# Altium PCB VYLT_IOT_CCM.PcbDoc
Units mm, origin at the board's own origin, x right, y up, seen from the top; angles counter-clockwise.
Board outline 137.1 x 87.1 mm, 4 copper layers (L1, L2, L3, L4), stack 1.58 mm thick; 10 components, 126 nets, 232 pads, 6 vias.
Unrouted connection lines stored in the file: 72.
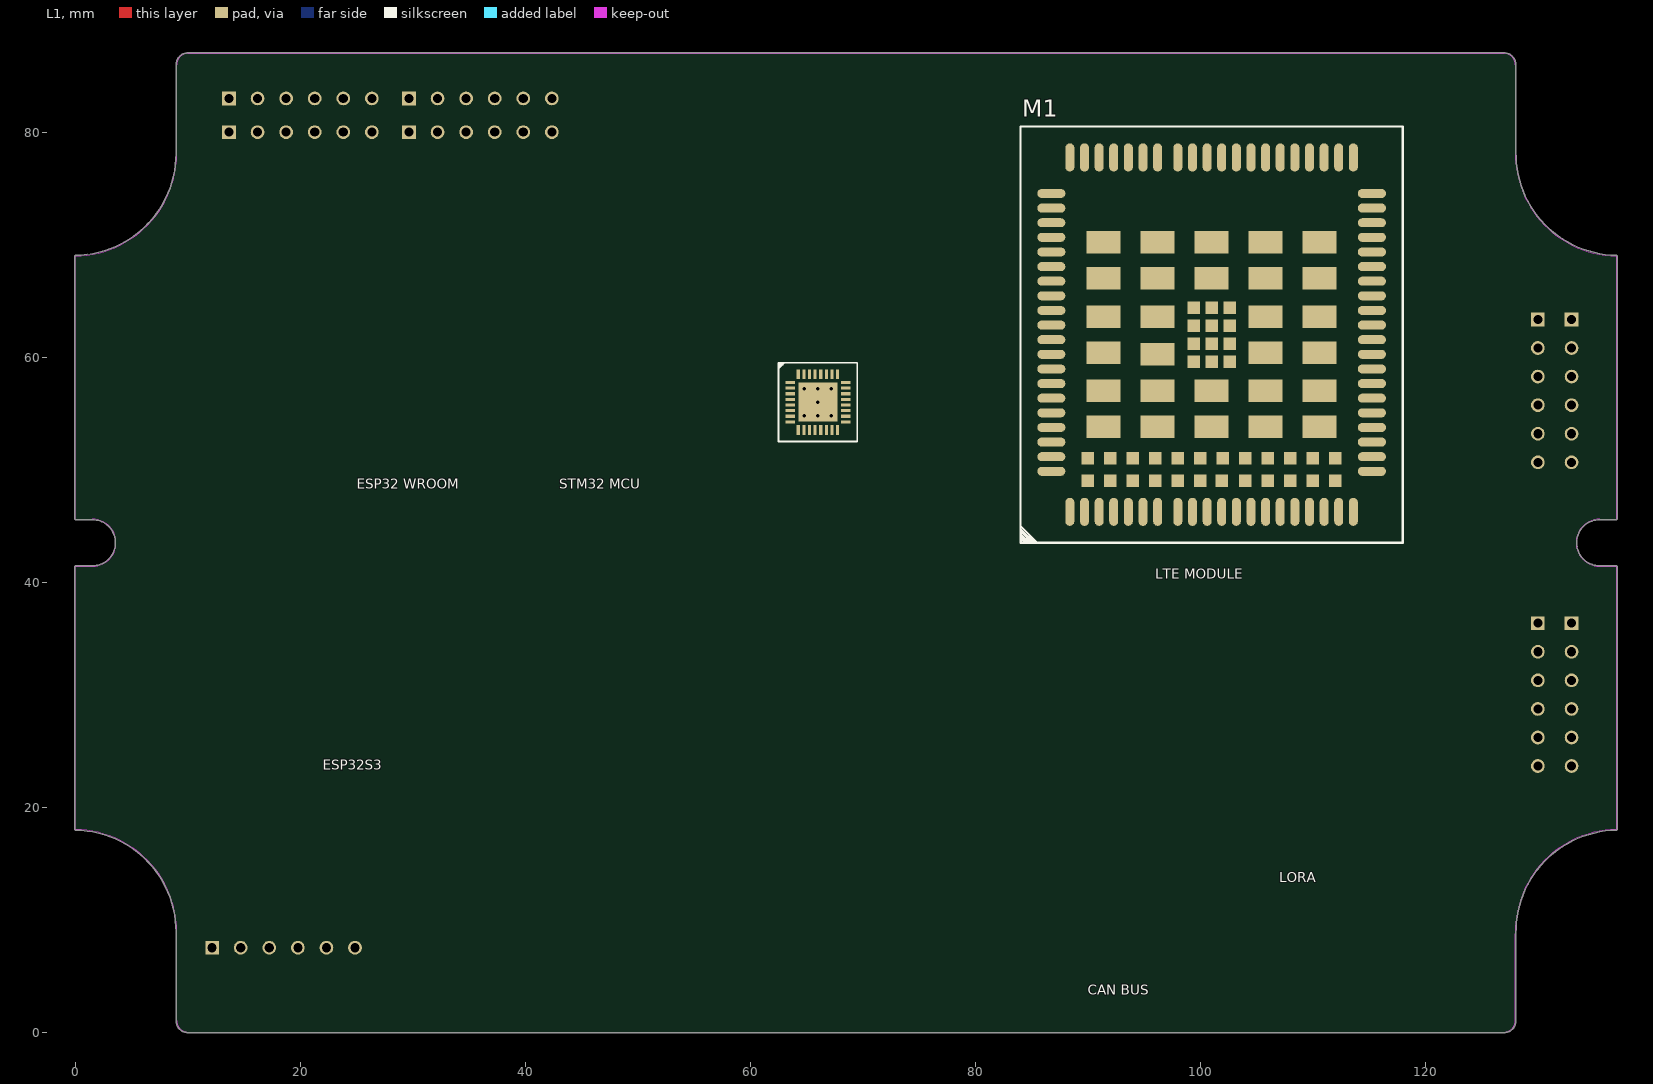
[diagram p0: L1 view]
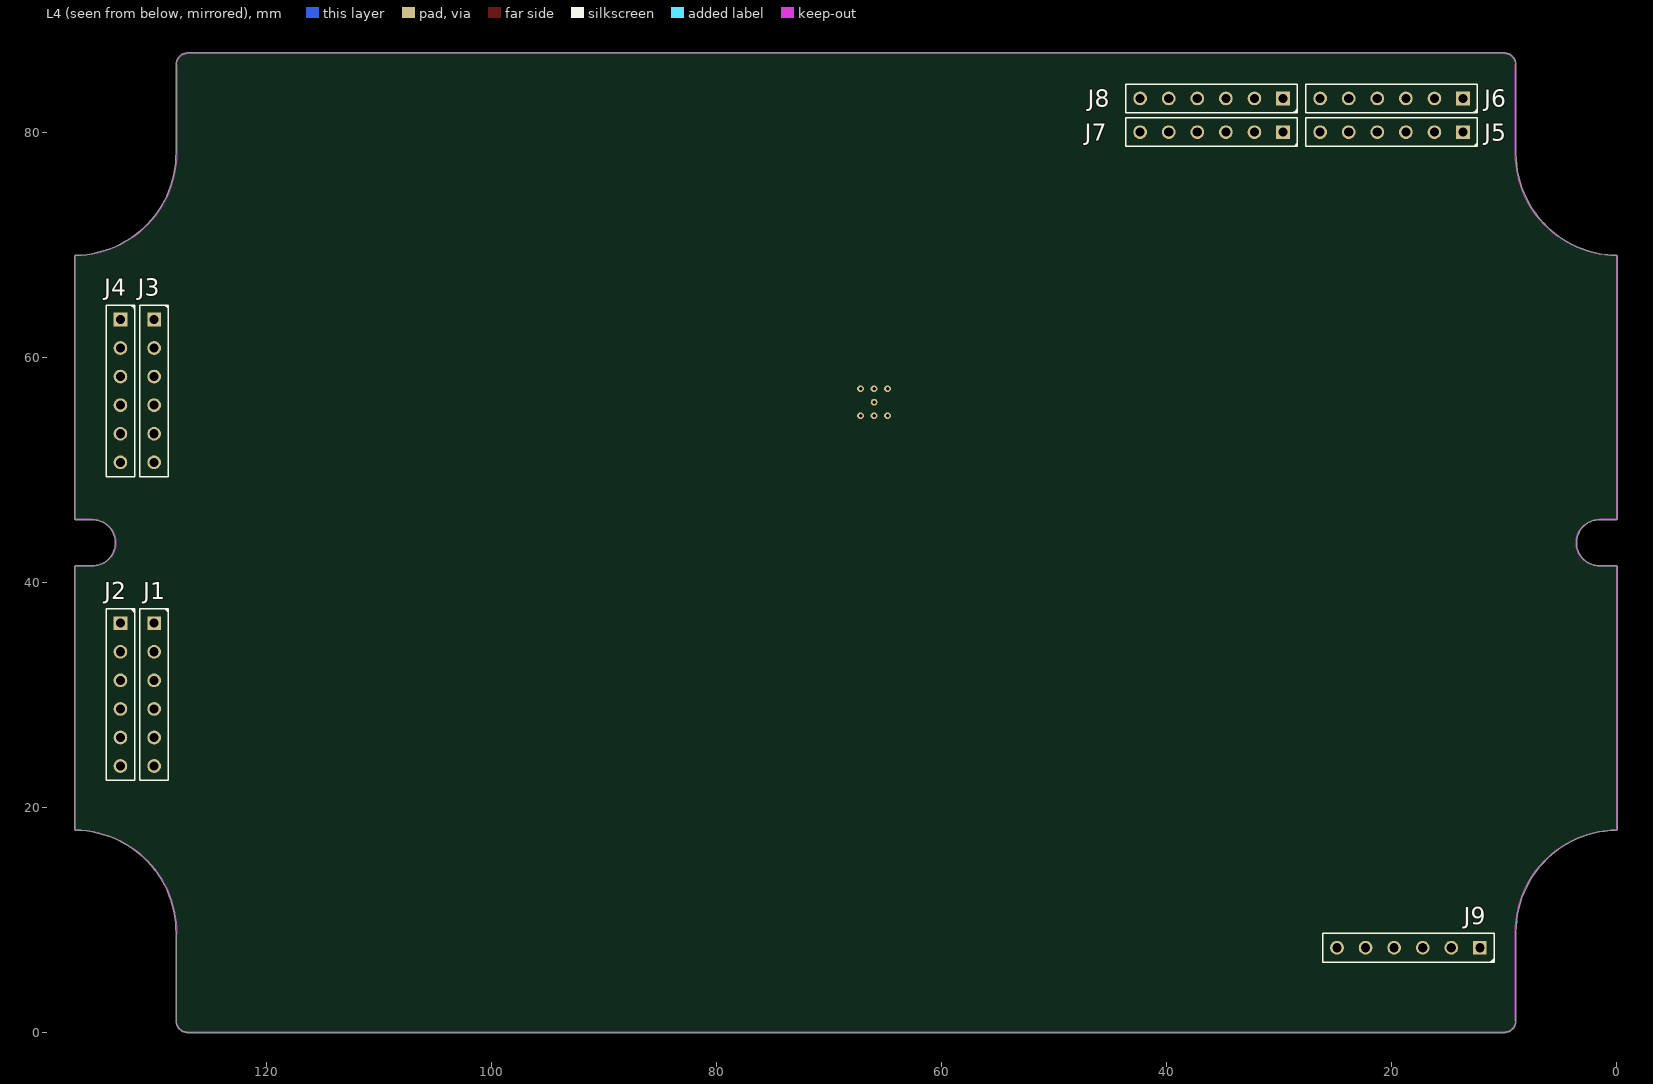
[diagram p1: L4 view, seen from below]
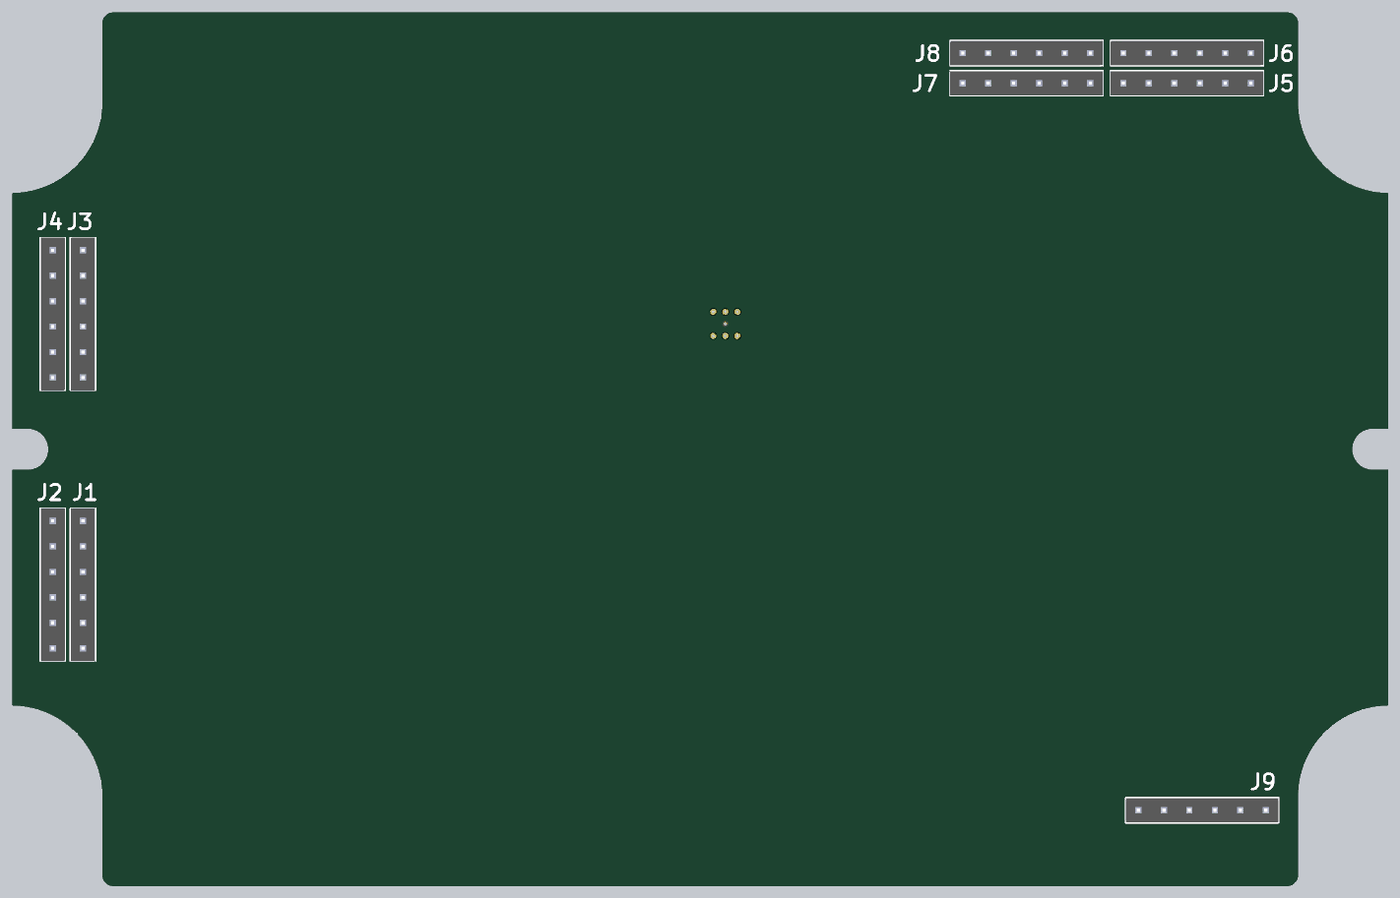
[diagram p2: 3D render of the assembled board from below, using the file's embedded part models]

## Layer stack, top to bottom
Top Solder: solder mask 0.01, Solder Resist, Dk 3.5
L1: signal copper 0.035
Dielectric 2: prepreg 0.12, PP-006, Dk 3.97
L2: signal copper 0.035
Dielectric 1: core 1.2, FR-4, Dk 4
L3: signal copper 0.035
Dielectric 3: prepreg 0.12, PP-006, Dk 3.97
L4: signal copper 0.035
Bottom Solder: solder mask 0.01, Solder Resist, Dk 3.5

## Board outline
-0.05,18.017 -0.05,41.4 0,41.45 1.5,41.45 1.501,41.45 ccw(c1.5,43.5) 3.55,43.5 ccw(c1.5,43.5) 1.5,45.55 0,45.55 -0.053,45.603 -0.053,69 -0.004,69.05 ccw(c-0.126,78.124) 8.947,78.124 8.947,78.247 8.947,85.997 8.95,86.014 cw(c10,86) 10,87.05 127,87.05 127.001,87.05 cw(c127,86) 128.05,86.014 128.053,85.997 128.054,78.247 128.054,78.246 ccw(c137.126,78.123) 137.003,69.051 137.05,68.983 137.05,45.6 137,45.55 135.5,45.55 135.499,45.55 ccw(c135.5,43.5) 135.5,41.45 137,41.45 137.05,41.4 137.05,18.017 137.004,17.95 ccw(c137.126,8.877) 128.053,8.754 128.053,8.753 128.053,1.003 128.05,0.986 cw(c127,1) 127,-0.05 10,-0.05 cw(c10,1) 8.95,0.986 8.947,1.003 8.947,8.753 8.947,8.877 ccw(c-0.126,8.877)

## Design rules (kind name [scope] priority, off if disabled: settings)
Clearance [All] p1: gap=0.254 ignorepadtopadclearanceinfootprint=FALSE except(0.178: SMDPad-SMDPad; 1: Arc-Poly Track-Poly SMDPad-Poly THPad-Poly Poly-Region)
DiffPairsRouting "Schematic Differential Pairs Routing" [InNet('MODEM_USB_N')] p1: maxlimit=0.178 minlimit=0.178 mostfreqgap=0.178 toplayer_minwidth=0.205 toplayer_maxwidth=0.205 toplayer_prefwidth=0.205 bottomlayer_minwidth=0.205 bottomlayer_maxwidth=0.205 bottomlayer_prefwidth=0.205 impedanceprofiledriven=TRUE impedanceprofileid={C2DE511F-1DFB-4F5E-9C73-6435A76327FB} impedanceprofilevalue=90.000000 maxuncoupledlength=12.7
DiffPairsRouting [All] p2: maxlimit=0.254 minlimit=0.254 mostfreqgap=0.254 toplayer_minwidth=0.381 toplayer_maxwidth=0.381 toplayer_prefwidth=0.381 midlayer1_minwidth=0.381 midlayer1_maxwidth=0.381 midlayer1_prefwidth=0.381 midlayer2_minwidth=0.381 midlayer2_maxwidth=0.381 midlayer2_prefwidth=0.381 bottomlayer_minwidth=0.381 bottomlayer_maxwidth=0.381 bottomlayer_prefwidth=0.381 maxuncoupledlength=12.7
Height [All] p1: minheight=0 maxheight=55 prefheight=12.7
PolygonConnect [All] p1: connectstyle=Relief reliefconductorwidth=0.254 reliefentries=4 polygonreliefangle="90 Angle" airgapwidth=0.254
RoutingVias [All] p1: holewidth=0.711 width=1.27 viastyle="Through Hole" minholewidth=0.1 minwidth=0.1 maxholewidth=0.711 maxwidth=1.27
SolderMaskExpansion [All] p1: expansion=0.102 istentingtop=FALSE
SupplyNets "Schematic Supply Nets" [InNet('GND')] p1: voltage=0.000
Width [All] p1: maxlimit=0.254 minlimit=0.254 preferedwidth=0.254
28 further rules are at their usual default settings.

## Classes and differential pairs
differential pair class USB_90R: MODEM_USB
net class M1_Nets: GND MODEM_ANT_GNSS MODEM_ANT_LTE MODEM_I2C1_SCL MODEM_I2C1_SDA MODEM_LED_NETMODE MODEM_LED_NETSTAT MODEM_LED_STATUS MODEM_SD_CLK MODEM_SD_CMD MODEM_SD_DATA0 MODEM_SD_DATA1 MODEM_SD_DATA2 MODEM_SD_DATA3 MODEM_SD_DETECT MODEM_SD_VDD MODEM_SPI0_CLK MODEM_SPI0_CS MODEM_SPI0_MI MODEM_SPI0_MO MODEM_USB_N MODEM_USB_P MODEM_USB_VBUS MODEM_USBBOOT MODEM_USIM_CLK MODEM_USIM_DATA MODEM_USIM_DET MODEM_USIM_GND MODEM_USIM_RST MODEM_USIM_VDD NetM1_1 NetM1_2 NetM1_3 NetM1_4 NetM1_7 NetM1_11 NetM1_12 NetM1_18 NetM1_20 NetM1_21 NetM1_24 NetM1_25 NetM1_26 NetM1_27 NetM1_35 NetM1_43 NetM1_44 NetM1_45 NetM1_55 NetM1_57 NetM1_58 NetM1_59 NetM1_60 NetM1_62 NetM1_63 NetM1_64 NetM1_65 NetM1_66 NetM1_67 NetM1_68 NetM1_73 NetM1_74 NetM1_75 NetM1_77 NetM1_78 NetM1_79 NetM1_80 NetM1_81 NetM1_82 NetM1_83 NetM1_84 NetM1_113 NetM1_114 NetM1_116 NetM1_117 NetM1_118 NetM1_119 NetM1_120 NetM1_121 NetM1_122 NetM1_123 NetM1_124 NetM1_125 NetM1_126 NetM1_127 NetM1_128 NetM1_129 NetM1_130 NetM1_131 NetM1_132 NetM1_133 NetM1_134 NetM1_135 NetM1_136 NetM1_137 NetM1_138 NetM1_139 NetM1_140 NetM1_141 NetM1_142 NetM1_143 NetM1_144
component class MODEM: M1
net class J9_Nets: NetJ9_1 NetJ9_2 NetJ9_3 NetJ9_4 NetJ9_5 NetJ9_6
net class J8_Nets: GND
net class J7_Nets: NetJ7_1 NetJ7_2 NetJ7_3 NetJ7_4 NetJ7_5 NetJ7_6
net class J6_Nets: NetJ6_1 NetJ6_2 NetJ6_3 NetJ6_4 NetJ6_5 NetJ6_6
net class J5_Nets: NetJ5_1 NetJ5_2 NetJ5_3 NetJ5_4 NetJ5_5 NetJ5_6
net class J4_Nets: GND
net class J3_Nets: GND
net class J2_Nets: GND
net class J1_Nets: GND
component class POWER: J1 J2 J3 J4 J5 J6 J7 J8 J9
differential pair MODEM_USB: +MODEM_USB_P -MODEM_USB_N

## Components (designator, comment, footprint, x,y, rotation, side; value= is the part's Value field where it differs from the comment)
J1 "6PX1R_M" 6PX1R_M_STK20 130,30 r90 bottom locked
J2 "6PX1R_M" 6PX1R_M_STK20 133,30 r90 bottom locked
J3 "6PX1R_M" 6PX1R_M_STK20 130,57 r90 bottom locked
J4 "6PX1R_M" 6PX1R_M_STK20 133,57 r90 bottom locked
J5 "6PX1R_M" 6PX1R_M_STK20 20,80 r180 bottom locked
J6 "6PX1R_M" 6PX1R_M_STK20 20,83 r180 bottom locked
J7 "6PX1R_M" 6PX1R_M_STK20 36,80 r180 bottom locked
J8 "6PX1R_M" 6PX1R_M_STK20 36,83 r180 bottom locked
J9 "6PX1R_M" 6PX1R_M_STK20 18.5,7.5 r180 bottom
M1 "EC200U" EC200U 101,62 r90 top

## Footprints (in the part's own frame and the unit in brackets; to place one, negate y for a bottom-side part, rotate by r counter-clockwise, add the part's x,y. Pads: shape width x height; smd on the part's side, far side on the other; paste and mask are expansions set on the pad)
6PX1R_M_STK20 [mm]
  rect 1.22x1.22 / inner round 1.22 / far side rect 1.22x1.22 hole 0.81: 1(6.35,0)
  round 1.22 hole 0.81: 2(3.81,0) 3(1.27,0) 4(-1.27,0) 5(-3.81,0) 6(-6.35,0)
  silkscreen extent -7.62,-1.27 7.62,1.27, body extent -7.62,-1.2 7.62,1.2, height 18.11
EC200U [mm] "LTE CAT1 MODEM 144 SMD"
  rrect100% 2.5x0.8 smd: 1(-15.75,12.6) 2(-15.75,11.3) 3(-15.75,10) 4(-15.75,8.7) 5(-15.75,7.4) 6(-15.75,6.1) 7(-15.75,4.8) 8(-15.75,0.4) 9(-15.75,-0.9) 10(-15.75,-2.2) 11(-15.75,-3.5) 12(-15.75,-4.8) 13(-15.75,-6.1) 14(-15.75,-7.4) 15(-15.75,-8.7) 16(-15.75,-10) 17(-15.75,-11.3) 18(-15.75,-12.6) 37(15.75,-12.6) 38(15.75,-11.3) 39(15.75,-10) 40(15.75,-8.7) 41(15.75,-7.4) 42(15.75,-6.1) 43(15.75,-4.8) 44(15.75,-3.5) 45(15.75,-2.2) 46(15.75,-0.9) 47(15.75,0.4) 48(15.75,4.8) 49(15.75,6.1) 50(15.75,7.4) 51(15.75,8.7) 52(15.75,10) 53(15.75,11.3) 54(15.75,12.6) 141(-15.75,3) 142(-15.75,1.7) 143(15.75,1.7) 144(15.75,3)
  rrect100% 0.8x2.5 smd: 19(-9.55,-14.25) 20(-8.25,-14.25) 21(-6.95,-14.25) 22(-5.65,-14.25) 23(-4.35,-14.25) 24(-3.05,-14.25) 25(-1.75,-14.25) 26(-0.45,-14.25) 27(0.85,-14.25) 28(2.15,-14.25) 29(3.45,-14.25) 30(4.75,-14.25) 31(6.05,-14.25) 32(7.35,-14.25) 33(8.65,-14.25) 34(9.95,-14.25) 35(11.25,-14.25) 36(12.55,-14.25) 55(12.55,14.25) 56(11.25,14.25) 57(9.95,14.25) 58(8.65,14.25) 59(7.35,14.25) 60(6.05,14.25) 61(4.75,14.25) 62(3.45,14.25) 63(2.15,14.25) 64(0.85,14.25) 65(-0.45,14.25) 66(-1.75,14.25) 67(-3.05,14.25) 68(-4.35,14.25) 69(-5.65,14.25) 70(-6.95,14.25) 71(-8.25,14.25) 72(-9.55,14.25) 113(-10.85,14.25) 114(-12.15,14.25) 115(-10.85,-14.25) 116(-12.15,-14.25)
  rect 1.1x1.1 smd: 73(2.4,1.6) 74(2.4,0) 75(2.4,-1.6) 76(0.8,1.6) 77(0.8,0) 78(0.8,-1.6) 79(-0.8,1.6) 80(-0.8,0) 81(-0.8,-1.6) 82(-2.4,1.6) 83(-2.4,0) 84(-2.4,-1.6) 117(-11,11) 118(-11,9) 119(-11,7) 120(-11,5) 121(-11,3) 122(-11,1) 123(-11,-1) 124(-11,-3) 125(-11,-5) 126(-11,-7) 127(-11,-9) 128(-11,-11) 129(-13,11) 130(-13,9) 131(-13,7) 132(-13,5) 133(-13,3) 134(-13,1) 135(-13,-0.9) 136(-13,-3) 137(-13,-5) 138(-13,-7) 139(-13,-9) 140(-13,-11)
  rect 2x3 smd: 85(8.2,9.6) 86(8.2,4.8) 87(8.2,0) 88(8.2,-4.8) 89(8.2,-9.6) 90(5,9.6) 91(5,4.8) 92(5,0) 93(5,-4.8) 94(5,-9.6) 95(1.6,9.6) 96(1.6,4.8) 97(1.6,-4.8) 98(1.6,-9.6) 99(-1.6,9.6) 100(-1.75,4.8) 101(-1.6,-4.8) 102(-1.6,-9.6) 103(-5,9.6) 104(-5,4.8) 105(-5,0) 106(-5,-4.8) 107(-5,-9.6) 108(-8.2,9.6) 109(-8.2,4.8) 110(-8.2,0) 111(-8.2,-4.8) 112(-8.2,-9.6)
  silkscreen extent -18.5,-17 18.5,17, body extent -15.5,-14 15.5,14, height 2.4

## Part data
J1 J2 J3 J4 J5 J6 J7 J8 J9: "6PX1R Male Header"
M1: "LTE CAT1 MODEM 144 SMD", Manufacturer 1=Quectel

## Free pads (board coordinates)
  rect 0.85x0.28 smd paste-0.14 mask+0: 1(63.525,57.75) 2(63.525,57.25) 3(63.525,56.75) 4(63.525,56.25) 5(63.525,55.75) 6(63.525,55.25) 7(63.525,54.75) 8(63.525,54.25) 17(68.475,54.25) 18(68.475,54.75) 19(68.475,55.25) 20(68.475,55.75) 21(68.475,56.25) 22(68.475,56.75) 23(68.475,57.25) 24(68.475,57.75)
  rect 0.28x0.85 smd paste-0.14 mask+0: 9(64.25,53.525) 10(64.75,53.525) 11(65.25,53.525) 12(65.75,53.525) 13(66.25,53.525) 14(66.75,53.525) 15(67.25,53.525) 16(67.75,53.525) 25(67.75,58.475) 26(67.25,58.475) 27(66.75,58.475) 28(66.25,58.475) 29(65.75,58.475) 30(65.25,58.475) 31(64.75,58.475) 32(64.25,58.475)
  round 0.6 hole 0.3 paste-2539.97 mask-0.254: 33(66,56)
  rect 3.45x3.45 smd paste-1.712 mask-1.714: 33(66,56)

## Via types
v1: diameter 0.6, hole 0.3, L1 to L4, 6 vias

## Nets (pads, with @x,y where several pads share a name; then routed paths per layer and width w, separated by ;. In a path a pad name is that pad's centre, name@x,y a point inside that pad or via, vN(x,y) a via of type N, cw(c..) or ccw(c..) an arc to the next point about the centre after c; other vN are vias at no path point)
GND: J1.1 J1.2 J1.3 J1.4 J1.5 J1.6 J2.1 J2.2 J2.3 J2.4 J2.5 J2.6 J3.1 J3.2 J3.3 J3.4 J3.5 J3.6 J4.1 J4.2 J4.3 J4.4 J4.5 J4.6 J8.1 J8.2 J8.3 J8.4 J8.5 J8.6 M1.8 M1.9 M1.19 M1.22 M1.36 M1.46 M1.48 M1.50 M1.51 M1.52 M1.53 M1.54 M1.56 M1.72 M1.76 M1.85 M1.86 M1.87 M1.88 M1.89 M1.90 M1.91 M1.92 M1.93 M1.94 M1.95 M1.96 M1.97 M1.98 M1.99 M1.100 M1.101 M1.102 M1.103 M1.104 M1.105 M1.106 M1.107 M1.108 M1.109 M1.110 M1.111 M1.112
MODEM_ANT_GNSS: M1.47
MODEM_ANT_LTE: M1.49
MODEM_I2C1_SCL: M1.41
MODEM_I2C1_SDA: M1.42
MODEM_LED_NETMODE: M1.5
MODEM_LED_NETSTAT: M1.6
MODEM_LED_STATUS: M1.61
MODEM_SD_CLK: M1.32
MODEM_SD_CMD: M1.33
MODEM_SD_DATA0: M1.31
MODEM_SD_DATA1: M1.30
MODEM_SD_DATA2: M1.29
MODEM_SD_DATA3: M1.28
MODEM_SD_DETECT: M1.23
MODEM_SD_VDD: M1.34
MODEM_SPI0_CLK: M1.40
MODEM_SPI0_CS: M1.37
MODEM_SPI0_MI: M1.39
MODEM_SPI0_MO: M1.38
MODEM_USB_N: M1.70
MODEM_USB_P: M1.69
MODEM_USB_VBUS: M1.71
MODEM_USBBOOT: M1.115
MODEM_USIM_CLK: M1.16
MODEM_USIM_DATA: M1.15
MODEM_USIM_DET: M1.13
MODEM_USIM_GND: M1.10
MODEM_USIM_RST: M1.17
MODEM_USIM_VDD: M1.14
NetJ5_1: J5.1
NetJ5_2: J5.2
NetJ5_3: J5.3
NetJ5_4: J5.4
NetJ5_5: J5.5
NetJ5_6: J5.6
NetJ6_1: J6.1
NetJ6_2: J6.2
NetJ6_3: J6.3
NetJ6_4: J6.4
NetJ6_5: J6.5
NetJ6_6: J6.6
NetJ7_1: J7.1
NetJ7_2: J7.2
NetJ7_3: J7.3
NetJ7_4: J7.4
NetJ7_5: J7.5
NetJ7_6: J7.6
NetJ9_1: J9.1
NetJ9_2: J9.2
NetJ9_3: J9.3
NetJ9_4: J9.4
NetJ9_5: J9.5
NetJ9_6: J9.6
NetM1_1: M1.1
NetM1_2: M1.2
NetM1_3: M1.3
NetM1_4: M1.4
NetM1_7: M1.7
NetM1_11: M1.11
NetM1_12: M1.12
NetM1_18: M1.18
NetM1_20: M1.20
NetM1_21: M1.21
NetM1_24: M1.24
NetM1_25: M1.25
NetM1_26: M1.26
NetM1_27: M1.27
NetM1_35: M1.35
NetM1_43: M1.43
NetM1_44: M1.44
NetM1_45: M1.45
NetM1_55: M1.55
NetM1_57: M1.57
NetM1_58: M1.58
NetM1_59: M1.59
NetM1_60: M1.60
NetM1_62: M1.62
NetM1_63: M1.63
NetM1_64: M1.64
NetM1_65: M1.65
NetM1_66: M1.66
NetM1_67: M1.67
NetM1_68: M1.68
NetM1_73: M1.73
NetM1_74: M1.74
NetM1_75: M1.75
NetM1_77: M1.77
NetM1_78: M1.78
NetM1_79: M1.79
NetM1_80: M1.80
NetM1_81: M1.81
NetM1_82: M1.82
NetM1_83: M1.83
NetM1_84: M1.84
NetM1_113: M1.113
NetM1_114: M1.114
NetM1_116: M1.116
NetM1_117: M1.117
NetM1_118: M1.118
NetM1_119: M1.119
NetM1_120: M1.120
NetM1_121: M1.121
NetM1_122: M1.122
NetM1_123: M1.123
NetM1_124: M1.124
NetM1_125: M1.125
NetM1_126: M1.126
NetM1_127: M1.127
NetM1_128: M1.128
NetM1_129: M1.129
NetM1_130: M1.130
NetM1_131: M1.131
NetM1_132: M1.132
NetM1_133: M1.133
NetM1_134: M1.134
NetM1_135: M1.135
NetM1_136: M1.136
NetM1_137: M1.137
NetM1_138: M1.138
NetM1_139: M1.139
NetM1_140: M1.140
NetM1_141: M1.141
NetM1_142: M1.142
NetM1_143: M1.143
NetM1_144: M1.144
copper on no net:
  other v1: 64.8,54.8 66,54.8 67.2,54.8 64.8,57.2 66,57.2 67.2,57.2

## Polygon pours and split planes (outlines as drawn)
GND on L2 "NONET_L-01_P-001" (solid, remove dead copper, shelved, pour order 0): -304,11.5 -274,11.5 -274,-18.5 -304,-18.5
GND on L1 "NONET_L-01_P-001" (solid, remove dead copper, shelved, pour order 1): -304,11.5 -274,11.5 -274,-18.5 -304,-18.5
GND on L3 "NONET_L-01_P-001" (solid, remove dead copper, shelved, pour order 2): -304,11.5 -274,11.5 -274,-18.5 -304,-18.5

## Keep-outs
Keep-Out Layer:
  lines w0.1: -0.003,18 cw(c-0.126,8.877) 8.997,8.753 8.997,1.003 ; -0.003,45.603 -0.003,69 ccw(c-0.126,78.124) 8.997,78.247 8.997,85.997 ; 0,18.003 0,41.4 1.5,41.4 ccw(c1.5,43.5) 1.5,45.6 0,45.6 ; 9,1 ccw(c10,1) 10,0 127,0 ccw(c127,1) 128,1 ; 9,86 cw(c10,86) 10,87 127,87 cw(c127,86) 128,86 ; 128.003,1.003 128.003,8.753 cw(c137.126,8.877) 137.003,18 ; 128.003,85.997 128.003,78.247 ccw(c137.126,78.123) 137.003,69 ; 137,18.003 137,41.4 135.5,41.4 cw(c135.5,43.5) 135.5,45.6 137,45.6 137,68.998 ; 137.003,69 137.003,69

## Silkscreen, mask and mechanical layers (free items; w line width, h text height)
Top Overlay:
  lines w0.1: 62.52,58.87 62.52,58.946 63.028,59.454 ; 62.52,58.908 62.52,59.004 62.664,59.147 62.664,59.255 62.652,59.244 62.652,59.216 62.581,59.287 62.581,59.419 62.637,59.363 62.637,59.231 ; 62.607,59.393 62.607,59.262 62.637,59.231 ; 62.717,59.2 62.774,59.258 62.774,59.368 ; 62.607,59.2 62.52,59.287 62.617,59.383 62.678,59.383 62.678,59.5 62.723,59.454 63.028,59.454 ; 62.607,59.2 62.607,59.312 62.749,59.454 62.774,59.429 62.774,59.2 62.774,59.315 62.66,59.2 62.607,59.2 ; 62.607,59.2 62.721,59.315 62.721,59.376 62.8,59.454 63.028,59.454 ; 62.637,59.231 62.861,59.454 ; 62.637,59.231 62.52,59.114 62.52,59.061 62.69,59.231 62.748,59.231 62.86,59.343 62.917,59.343 62.942,59.368 62.774,59.368 ; 62.774,59.368 62.861,59.454 ; 62.774,59.368 62.861,59.454 ; 62.861,59.454 63.028,59.454
  lines w0.152: 62.5,52.5 69.5,52.5 69.5,59.5 62.5,59.5 62.5,52.5
  text "ESP32 WROOM" at 25,48 h1.52
  text "STM32 MCU" at 43,48 h1.52
  text "LTE MODULE" at 96,40 h1.52
  text "ESP32S3" at 22,23 h1.52
  text "LORA" at 107,13 h1.52
  text "CAN BUS" at 90,3 h1.52
Top Paste:
  drawing of 25 lines, arcs and shapes, not listed
Dimensions:
  lines w0.1: 0,0 0,0
Mechanical 13:
  lines w0.025: 63.425,57.305 64.695,58.575 ; 63.425,53.425 63.425,58.575 68.575,58.575 68.575,53.425 63.425,53.425
  text "*" at 63.887,57.365 h1.27
Mechanical 15:
  region: 64.027,53.315 63.342,53.315 63.342,54 63.017,54 63.017,58.288 63.342,58.288 63.342,58.973 64.027,58.973 64.027,59.298 68.315,59.298 68.315,58.973 69,58.973 69,58.288 69.325,58.288 69.325,54 69,54 69,53.315 68.315,53.315 68.315,52.99 64.027,52.99
  lines w0.152: 62.846,53.856 62.846,58.144 63.171,58.144 63.171,58.829 63.856,58.829 63.856,59.154 68.144,59.154 68.144,58.829 68.829,58.829 68.829,58.144 69.154,58.144 69.154,53.856 68.829,53.856 68.829,53.171 68.144,53.171 68.144,52.846 63.856,52.846 63.856,53.171 63.171,53.171 63.171,53.856 62.846,53.856